# Altium PCB PCB2.PcbDoc
Units mm, origin at the board's own origin, x right, y up, seen from the top; angles counter-clockwise.
Board outline 56 x 65 mm, 4 copper layers (Top Layer, Mid Layer 1, Mid Layer 2, Bottom Layer), stack 0.97 mm thick; 35 components, 26 nets, 144 pads, 248 vias.
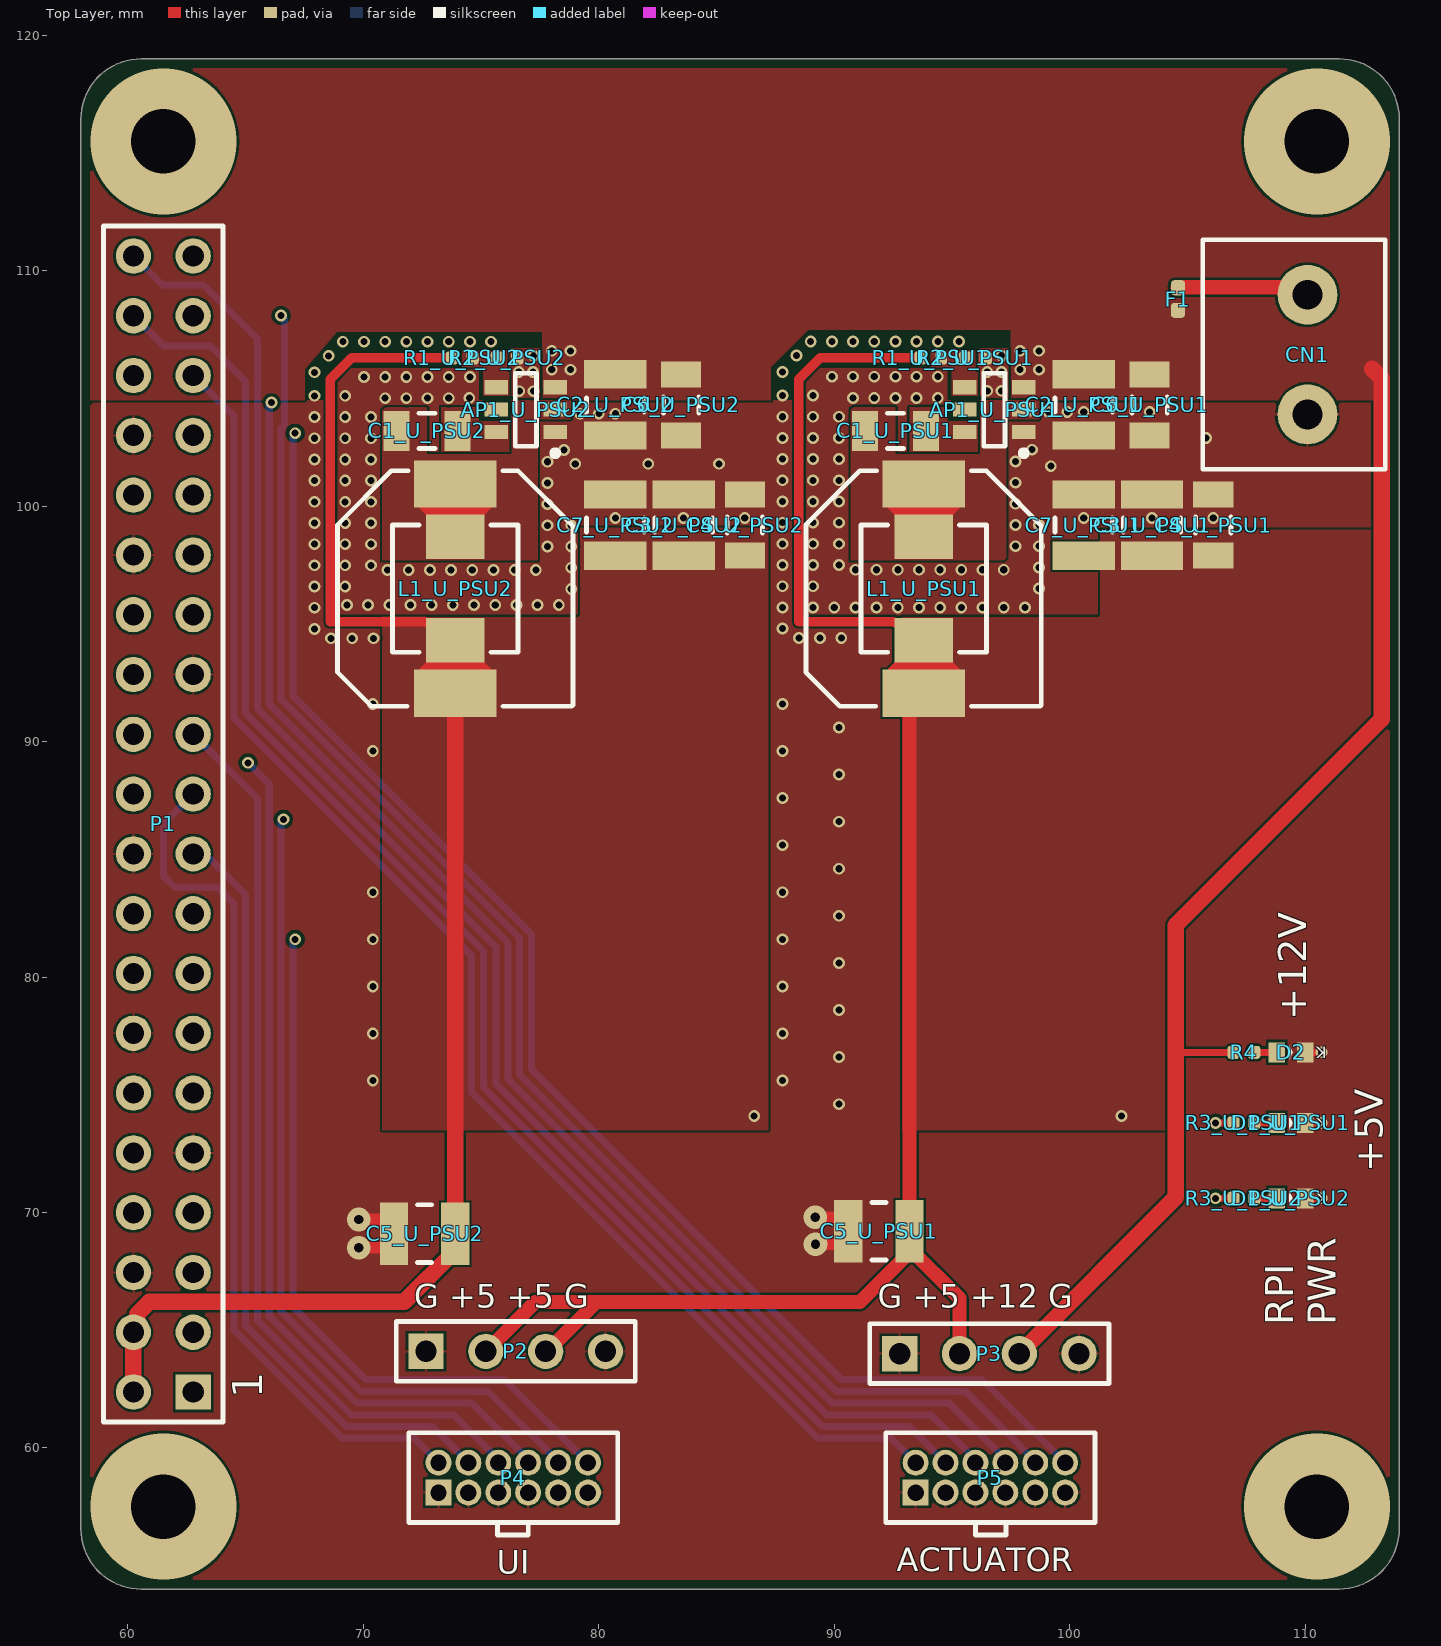
[diagram p0: Top Layer view]
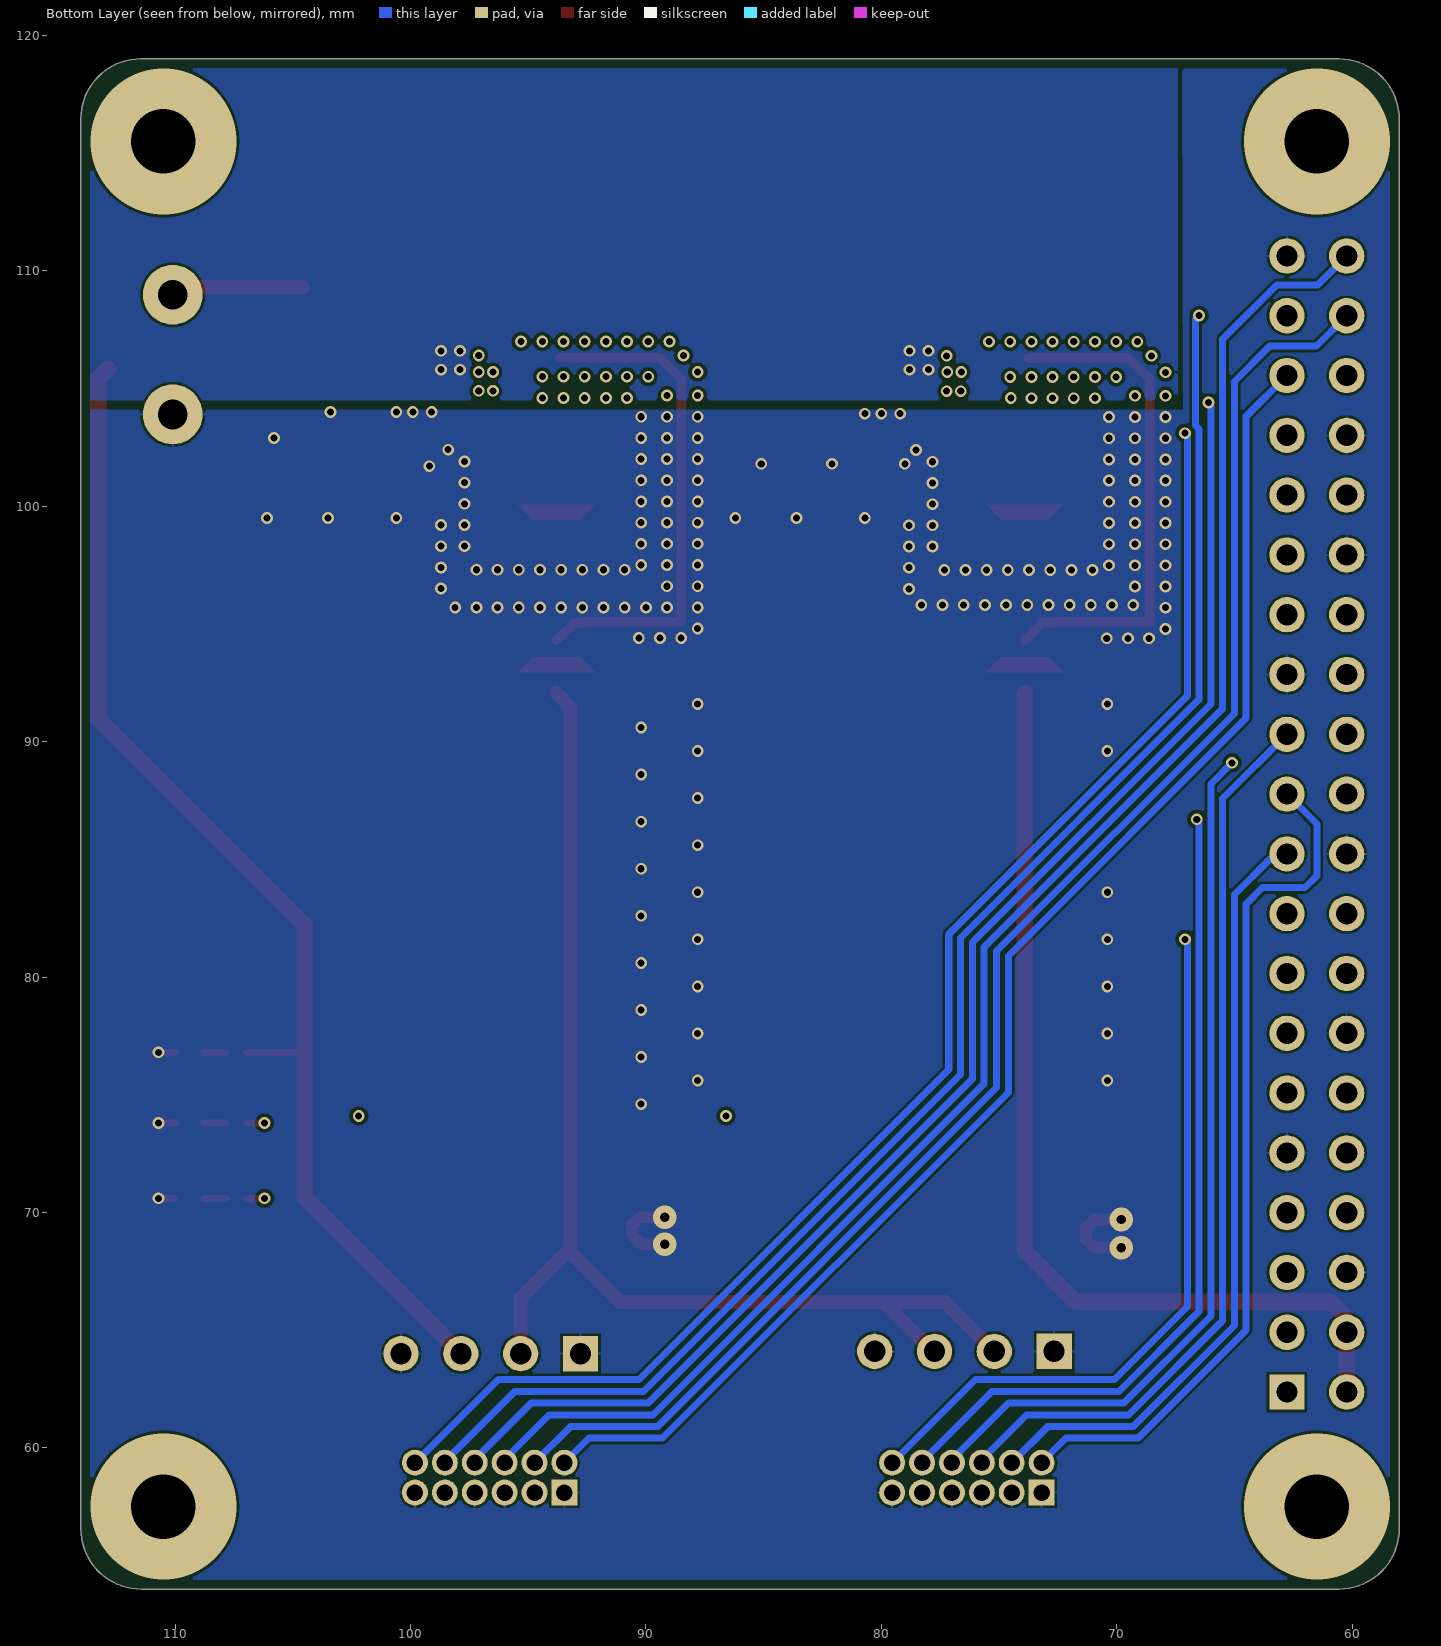
[diagram p1: Bottom Layer view, seen from below]
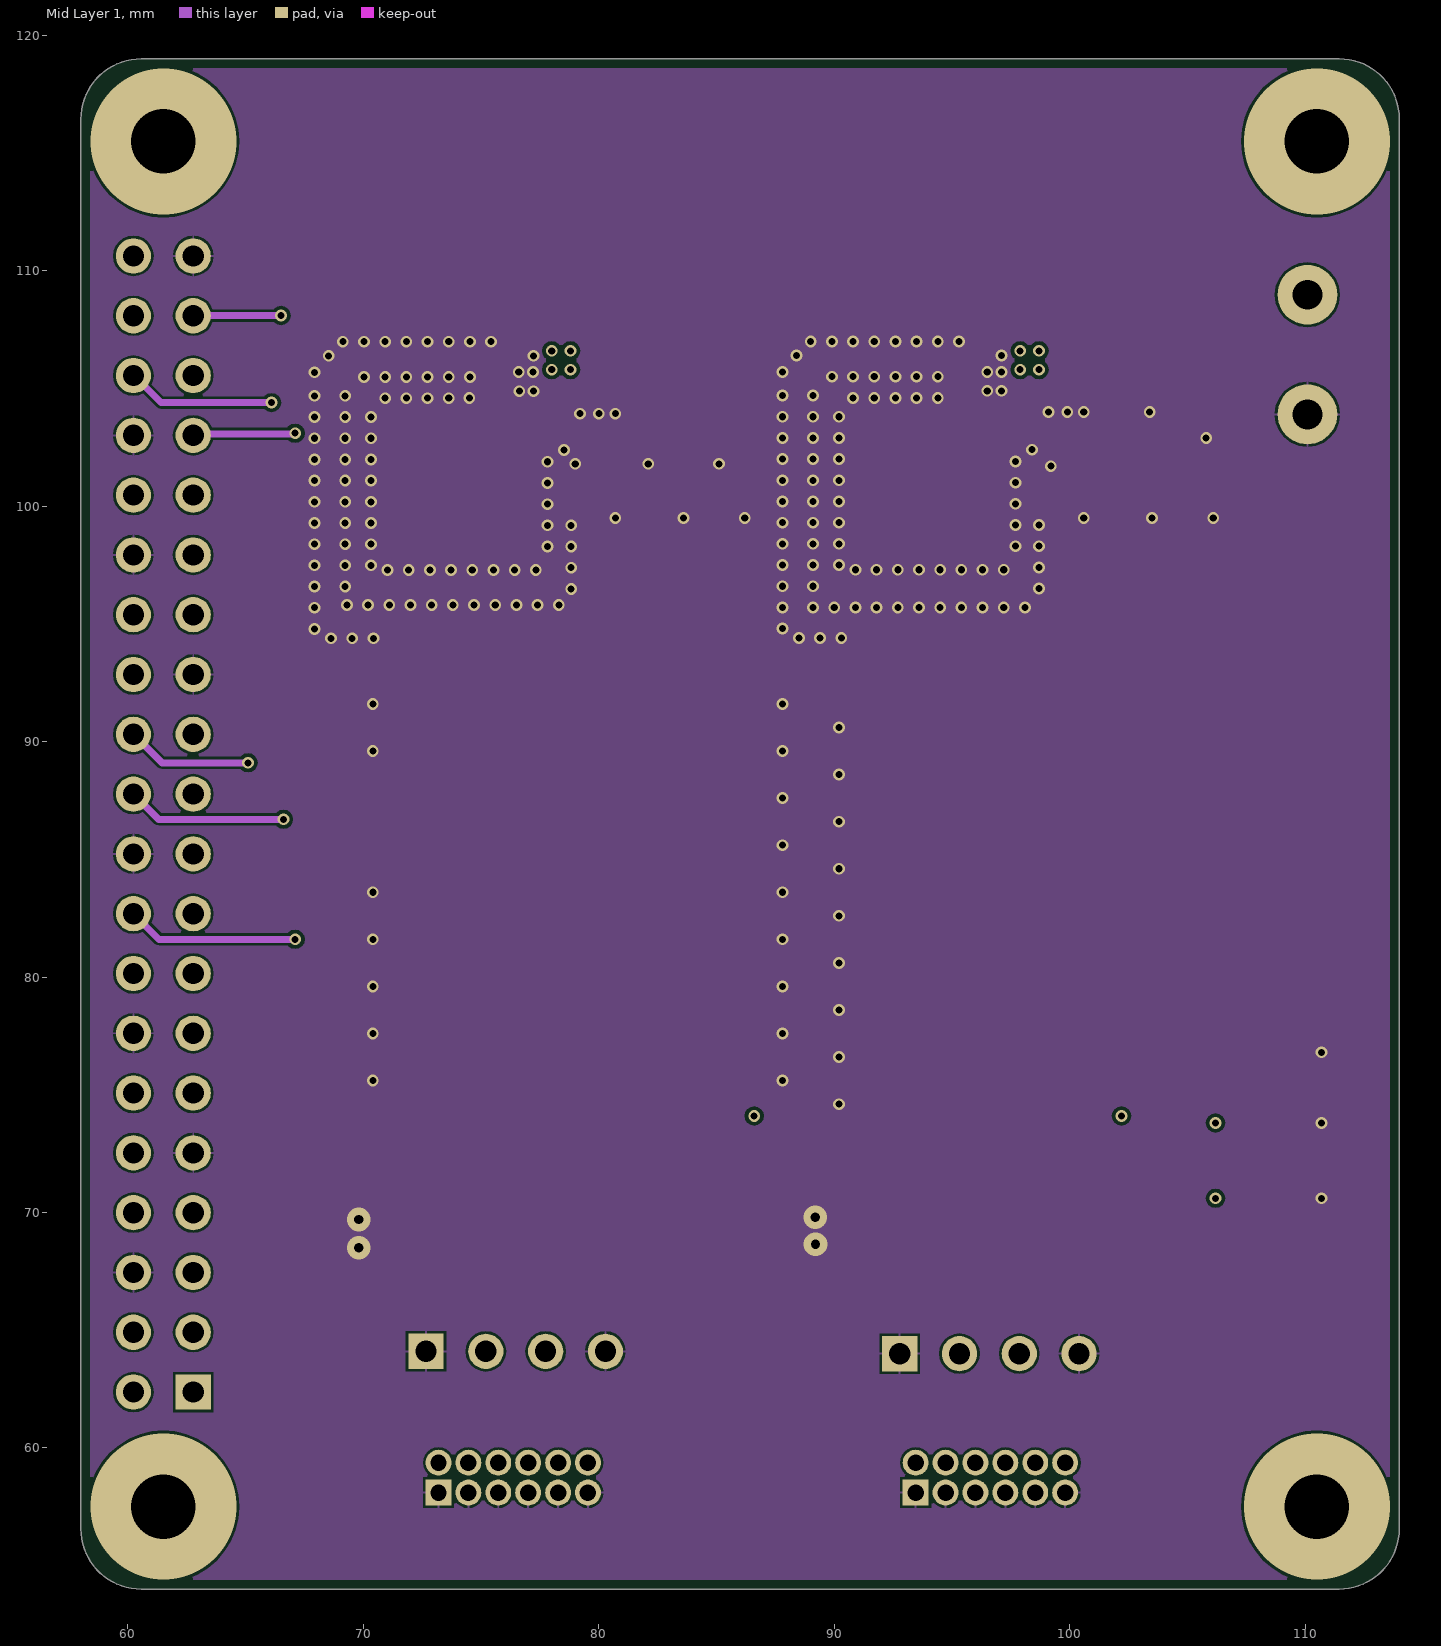
[diagram p2: Mid Layer 1]
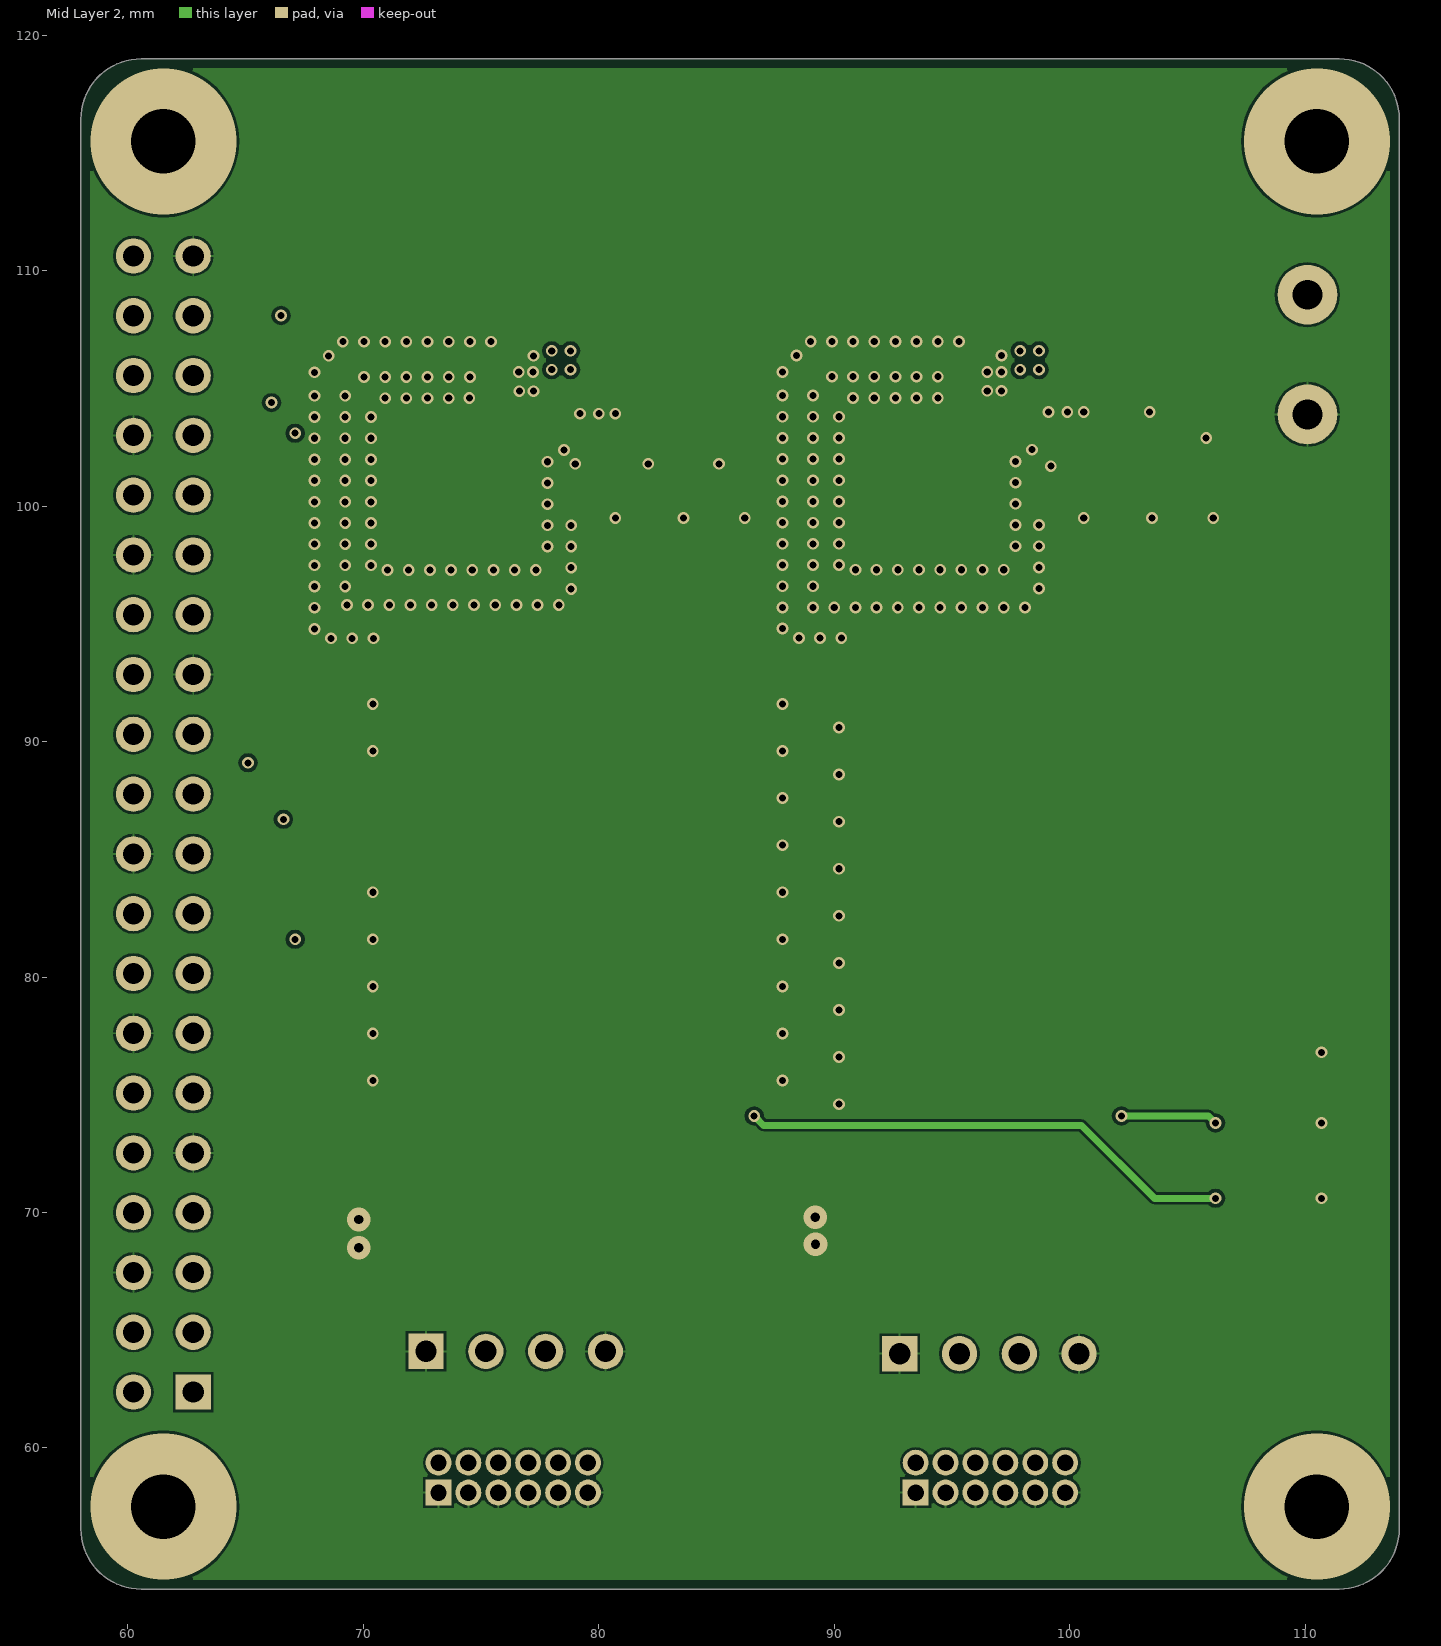
[diagram p3: Mid Layer 2]
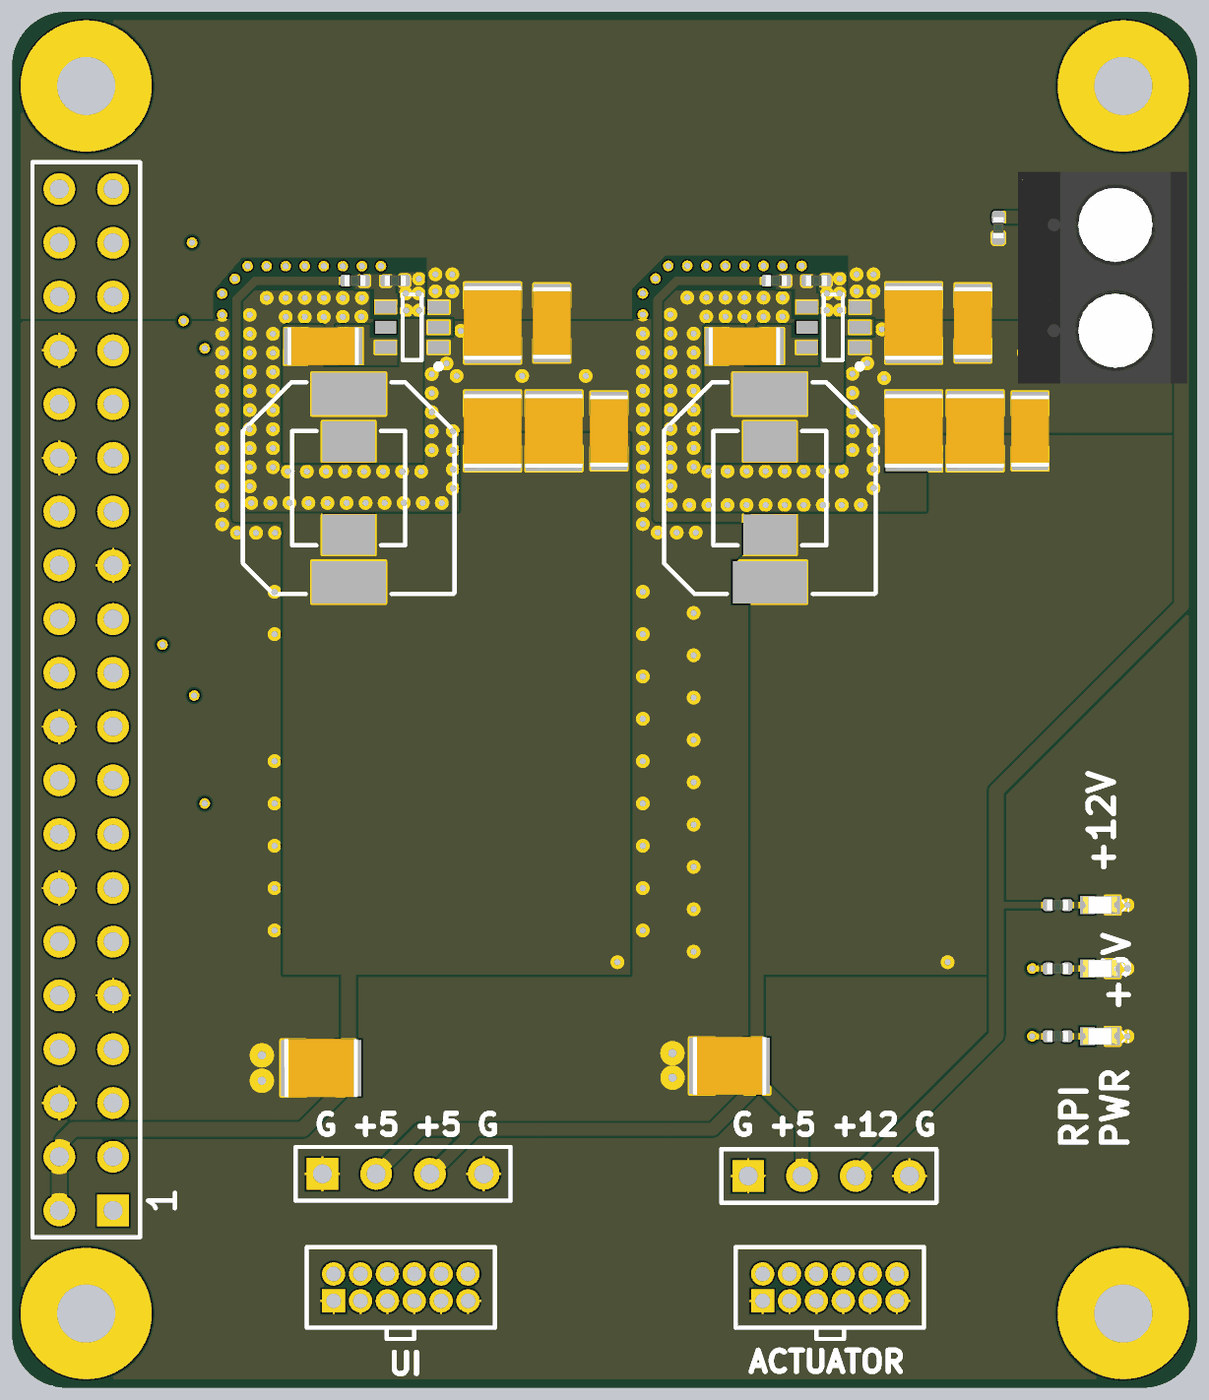
[diagram p4: 3D render of the assembled board from above, using the file's embedded part models]

## Layer stack, top to bottom
Top Solder: solder mask 0.0127, Solder Resist, Dk 3.8
Top Layer: signal copper 0.035
Dielectric 1: prepreg 0.2, 7628, Dk 4.6
Mid Layer 1: signal copper 0.0175
Core: core 0.465, FR-4, Dk 4.5
Mid Layer 2: signal copper 0.0175
Dielectric 2: prepreg 0.2, 7628, Dk 4.6
Bottom Layer: signal copper 0.035
Bottom Solder: solder mask 0.0127, Solder Resist, Dk 3.8

## Board outline
58,56.558 58,116.442 cw(c60.558,116.442) 60.558,119 111.461,119 cw(c111.461,116.461) 114,116.461 114,56.558 cw(c111.442,56.558) 111.442,54 60.558,54 cw(c60.558,56.558)

## Design rules (kind name [scope] priority, off if disabled: settings)
BoardOutlineClearance [All] p1: gap=0.2 ignorepadtopadclearanceinfootprint=FALSE
Clearance [All] p1: gap=0.102 ignorepadtopadclearanceinfootprint=FALSE except(0.127: Arc-Via Track-Via SMDPad-Via THPad-Via Via-Via Via-Fill Via-Poly Via-Region Via-Text; 0.25: Arc-Hole Track-Hole SMDPad-Hole THPad-Hole Via-Hole Fill-Hole Poly-Hole Region-Hole Text-Hole)
ComponentClearance [All] p1: gap=0.102 collisioncheckmode=3 verticalgap=0.102 showdistances=TRUE
DiffPairsRouting [All] p1: maxlimit=0.102 minlimit=0.102 mostfreqgap=0.102 toplayer_minwidth=0.102 toplayer_maxwidth=1816.048 toplayer_prefwidth=0.102 midlayer1_minwidth=0.102 midlayer1_maxwidth=1816.048 midlayer1_prefwidth=0.102 midlayer2_minwidth=0.102 midlayer2_maxwidth=1816.048 midlayer2_prefwidth=0.102 bottomlayer_minwidth=0.102 bottomlayer_maxwidth=1816.048 bottomlayer_prefwidth=0.102 maxuncoupledlength=12.7
Height [All] p1: minheight=0 maxheight=1816.048 prefheight=12.7
HoleSize [All] p1: absolutevalues=TRUE maxlimit=6.3 minlimit=0.3 maxpercent=80.000 minpercent=20.000
HoleToHoleClearance [All] p1: gap=0.25 allowstackedmicrovias=FALSE
MinimumAnnularRing [All] p1: minimumring=0.076
MinimumSolderMaskSliver [All] p1: minsoldermaskwidth=0
PlaneClearance [All] p1: clearance=0.102
PlaneConnect PlaneConnectPowerPads [InPadClass('PowerPads')] p1: planeconnectstyle=Direct reliefexpansion=0.508 reliefentries=4 reliefconductorwidth=0.254 reliefairgap=0.254
PlaneConnect [All] p2: pad.planeconnectstyle=Relief pad.reliefexpansion=0.3 pad.reliefentries=4 pad.reliefconductorwidth=0.102 pad.reliefairgap=0.102 via.planeconnectstyle=Direct via.reliefexpansion=0.3 via.reliefentries=4 via.reliefconductorwidth=0.127 via.reliefairgap=0.127
PolygonConnect PolygonConnectPowerPads [All vs (InPadClass('PowerPads'))] p1: connectstyle=Direct reliefconductorwidth=0.254 reliefentries=4 polygonreliefangle="90 Angle" airgapwidth=0.254
PolygonConnect [All] p2: thpad.connectstyle=Relief thpad.reliefconductorwidth=0.102 thpad.reliefentries=4 thpad.polygonreliefangle="90 Angle" thpad.airgapwidth=0.102 smdpad.connectstyle=Relief smdpad.reliefconductorwidth=0.102 smdpad.reliefentries=4 smdpad.polygonreliefangle="90 Angle" smdpad.airgapwidth=0.102 via.connectstyle=Direct via.reliefconductorwidth=0.127 via.reliefentries=4 via.polygonreliefangle="90 Angle" via.airgapwidth=0.127
RoomDefinition U_PSU2 [InComponentClass('U_PSU2')] p1: confinementstyle=ConfineIn formatcopy=TRUE lockcomponents=FALSE outline 64.2,64.9 87.3,64.9 87.3,111.1 64.2,111.1
RoomDefinition U_PSU1 [InComponentClass('U_PSU1')] p2: confinementstyle=ConfineIn formatcopy=TRUE lockcomponents=FALSE outline 87.3,64.9 107.2,64.9 107.2,111.1 87.3,111.1
RoutingVias [All] p1: holewidth=0.2 width=0.45 viastyle="Through Hole" minholewidth=0.2 minwidth=0.45 maxholewidth=6.3 maxwidth=6.55
SilkToSilkClearance [All] p1: silktosilkclearance=0
SilkToSolderMaskClearance [IsPad] p1: minsilkscreentomaskgap=0.102 clearancetoexposedcopper=TRUE
SolderMaskExpansion [All] p1: expansion=0.075 istentingtop=FALSE
Width [All] p1: maxlimit=1816.048 minlimit=0.102 preferedwidth=0.102
20 further rules are at their usual default settings.

## Classes and differential pairs
channel class PSU: U_PSU1 U_PSU2
component class U_PSU2: AP1_U_PSU2 C1_U_PSU2 C2_U_PSU2 C3_U_PSU2 C4_U_PSU2 C5_U_PSU2 C6_U_PSU2 C7_U_PSU2 D1_U_PSU2 L1_U_PSU2 R1_U_PSU2 R2_U_PSU2 R3_U_PSU2
component class U_PSU1: AP1_U_PSU1 C1_U_PSU1 C2_U_PSU1 C3_U_PSU1 C4_U_PSU1 C5_U_PSU1 C6_U_PSU1 C7_U_PSU1 D1_U_PSU1 L1_U_PSU1 R1_U_PSU1 R2_U_PSU1 R3_U_PSU1
component class main: CN1 D2 F1 P1 P2 P3 P4 P5 R4

## Components (designator, comment, footprint, x,y, rotation, side; value= is the part's Value field where it differs from the comment)
AP1_U_PSU1 "AP62301" SOT95P280X100-6L 96.8,104.1 r180 top (schematic designator AP1)
AP1_U_PSU2 "AP62301" SOT95P280X100-6L 76.9,104.1 r180 top (schematic designator AP1)
C1_U_PSU1 "100n" C3216_1206I_L 92.6,103.2 r180 top (schematic designator C1)
C1_U_PSU2 "100n" C3216_1206I_L 72.7,103.2 r180 top (schematic designator C1)
C2_U_PSU1 "10u" C3225_1210I_L 100.6,104.3 r270 top (schematic designator C2)
C2_U_PSU2 "10u" C3225_1210I_L 80.7,104.3 r270 top (schematic designator C2)
C3_U_PSU1 "22u" C3225_1210I_L 103.5,99.2 r90 top (schematic designator C3)
C3_U_PSU2 "22u" C3225_1210I_L 83.6,99.2 r90 top (schematic designator C3)
C4_U_PSU1 "100n" C3216_1206I_L 106.1,99.2 r90 top (schematic designator C4)
C4_U_PSU2 "100n" C3216_1206I_L 86.2,99.2 r90 top (schematic designator C4)
C5_U_PSU1 "22u" C3225_1210I_L 91.9,69.2 r180 top (schematic designator C5)
C5_U_PSU2 "22u" C3225_1210I_L 72.6,69.1 r180 top (schematic designator C5)
C6_U_PSU1 "100n" C3216_1206I_L 103.4,104.3 r270 top (schematic designator C6)
C6_U_PSU2 "100n" C3216_1206I_L 83.5,104.3 r270 top (schematic designator C6)
C7_U_PSU1 "22u" C3225_1210I_L 100.6,99.2 r90 top (schematic designator C7)
C7_U_PSU2 "22u" C3225_1210I_L 80.7,99.2 r90 top (schematic designator C7)
CN1 "VRSTNA SPONKA 2P/16A" "VRSTNA SPONKA 2P/16A" 110.1,108.98 r270 top
D1_U_PSU1 "LED" LED1608_0603I_L 109.4,73.8 r180 top (schematic designator D1)
D1_U_PSU2 "LED" LED1608_0603I_L 109.4,70.6 r180 top (schematic designator D1)
D2 "LED" LED1608_0603I_L 109.4,76.8 r180 top
F1 "FUSE" R1005_0402i_M 104.6,108.8 r90 top
L1_U_PSU1 "3.3uH" INDUCTOR 93.8,96.5 r270 top (schematic designator L1)
L1_U_PSU2 "3.3uH" INDUCTOR 73.9,96.5 r270 top (schematic designator L1)
P1 "RPI Header" HDR2X20 62.77,62.37 r90 top locked
P2 "UI PWR" HDR1X4 72.66,64.1 r0 top
P3 "ACT PWR" HDR1X4 92.78,64 r0 top locked
P4 "UI" "1.27MM HEADET THT" 78.27,59.37 r0 top locked
P5 "ACTUATOR" "1.27MM HEADET THT" 98.54,59.37 r0 top locked
R1_U_PSU1 "52.3k 1%" R1005_0402i_L 94.1,106.3 r0 top (schematic designator R1)
R1_U_PSU2 "52.3k 1%" R1005_0402i_L 74.2,106.3 r0 top (schematic designator R1)
R2_U_PSU1 "10k 1%" R1005_0402i_L 96,106.3 r0 top (schematic designator R2)
R2_U_PSU2 "10k 1%" R1005_0402i_L 76.1,106.3 r0 top (schematic designator R2)
R3_U_PSU1 "~300" R1005_0402i_L 107.4,73.8 r0 top (schematic designator R3)
R3_U_PSU2 "~300" R1005_0402i_L 107.4,70.6 r0 top (schematic designator R3)
R4 "~3k" R1005_0402i_L 107.4,76.8 r0 top

## Footprints (in the part's own frame and the unit in brackets; to place one, negate y for a bottom-side part, rotate by r counter-clockwise, add the part's x,y. Pads: shape width x height; smd on the part's side, far side on the other; paste and mask are expansions set on the pad)
"1.27MM HEADET THT" [mm]
  rect 1.1x1.1 hole 0.7: 1(-5.08,-1.27)
  round 1.1 hole 0.7: 2(-5.08,0) 3(-3.81,-1.27) 4(-3.81,0) 5(-2.54,-1.27) 6(-2.54,0) 7(-1.27,-1.27) 8(-1.27,0) 9(0,-1.27) 10(0,0) 11(1.27,-1.27) 12(1.27,0)
  silkscreen extent -6.35,-2.54 2.54,1.27
C3216_1206I_L [mm] "Chip Capacitor, 2-Leads, Body 3.20x1.60mm, IPC High Density"
  rect 1.1x1.7 smd: 1(-1.3,0) 2(1.3,0)
  silkscreen extent -0.35,-0.75 0.35,0.75, body extent -1.7,-0.9 1.7,0.9, height 1.8
C3225_1210I_L [mm] "Chip Capacitor, 2-Leads, Body 3.20x2.50mm, IPC High Density"
  rect 1.2x2.65 smd: 1(-1.3,0) 2(1.3,0)
  silkscreen extent -0.3,-1.22 0.3,1.23, body extent -1.75,-1.38 1.75,1.38, height 2.8
HDR1X4 [mm] "Connector; Header; 4 Position"
  rect 1.5x1.5 hole 0.9: 1(0,0)
  round 1.5 hole 0.9: 2(2.54,0) 3(5.08,0) 4(7.62,0)
  silkscreen extent -1.27,-1.27 8.89,1.27
HDR2X20 [mm] "Connector; Header; 20x2 Position"
  rect 1.5x1.5 hole 0.9: 1(0,0)
  round 1.5 hole 0.9: 2(0,2.54) 3(2.54,0) 4(2.54,2.54) 5(5.08,0) 6(5.08,2.54) 7(7.62,0) 8(7.62,2.54) 9(10.16,0) 10(10.16,2.54) 11(12.7,0) 12(12.7,2.54) 13(15.24,0) 14(15.24,2.54) 15(17.78,0) 16(17.78,2.54) 17(20.32,0) 18(20.32,2.54) 19(22.86,0) 20(22.86,2.54) 21(25.4,0) 22(25.4,2.54) 23(27.94,0) 24(27.94,2.54) 25(30.48,0) 26(30.48,2.54) 27(33.02,0) 28(33.02,2.54) 29(35.56,0) 30(35.56,2.54) 31(38.1,0) 32(38.1,2.54) 33(40.64,0) 34(40.64,2.54) 35(43.18,0) 36(43.18,2.54) 37(45.72,0) 38(45.72,2.54) 39(48.26,0) 40(48.26,2.54)
  silkscreen extent -1.27,-1.27 49.53,3.81
INDUCTOR [mm]
  rect 2x3.5 smd: 1(-4.445,0) 2(4.445,0)
  rect 1.9x2.5 smd: 1(-2.2,0) 2(2.2,0)
  Top Layer region: -3.556,1.651 -2.921,1.016 -2.921,-1.016 -3.556,-1.651
  Top Layer region: -1.143,1.778
  Top Layer region: 3.556,-1.651 2.921,-1.016 2.921,1.016 3.556,1.651
  silkscreen extent -5,-5 5,5
LED1608_0603I_L [mm] "SMD LED, 2-Leads, Body 1.57x0.85mm, IPC High Density"
  rect 0.7x0.85 smd: 1(-0.6,0) 2(0.6,0)
  silkscreen extent -0.08,-0.3 0.08,0.3, body extent -0.8,-0.4 0.8,0.4, height 0.7
R1005_0402i_L [mm] "Resistor, Chip; 1.00 mm L X 0.50 mm W X 0.40 mm H body"
  rrect50% 0.52x0.56 smd: 1(-0.44,0) 2(0.44,0)
  body extent -0.5,-0.25 0.5,0.25, height 0.4
R1005_0402i_M [mm] "Resistor, Chip; 1.00 mm L X 0.50 mm W X 0.40 mm H body"
  rrect50% 0.64x0.6 smd: 1(-0.48,0) 2(0.48,0)
  body extent -0.5,-0.25 0.5,0.25, height 0.4
SOT95P280X100-6L [mm] "SOT23, 6-Leads, Body 2.90x2.80mm, Pitch 0.95mm, IPC High Density"
  rect 1x0.6 smd: 1(-1.25,0.95) 2(-1.25,0) 3(-1.25,-0.95) 4(1.25,-0.95) 5(1.25,0) 6(1.25,0.95)
  silkscreen extent -1.38,-1.55 0.45,1.97, body extent -1.5,-1.55 1.5,1.55, height 1
"VRSTNA SPONKA 2P/16A" [mm]
  round 2.54 hole 1.27: 1(0,0) 2(5.08,0)
  silkscreen extent -2.34,-4.45 7.42,3.3, body extent -2.46,-4.57 7.54,3.43, height 10.01

## Part data
C1_U_PSU1 C1_U_PSU2 C2_U_PSU1 C2_U_PSU2 C3_U_PSU1 C3_U_PSU2 C4_U_PSU1 C4_U_PSU2 C5_U_PSU1 C5_U_PSU2 C6_U_PSU1 C6_U_PSU2 C7_U_PSU1 C7_U_PSU2: library part C, "Capacitor"
L1_U_PSU1 L1_U_PSU2: library part L, "L"
P1: library part "Header 20X2", "Header, 20-Pin, Dual row", LatestRevisionDate=17-Jul-2002, LatestRevisionNote="Re-released for DXP Platform.", Publisher="Altium Limited"
P2 P3: library part "Header 4", "Header, 4-Pin", LatestRevisionDate=17-Jul-2002, LatestRevisionNote="Re-released for DXP Platform.", Publisher="Altium Limited"
P4 P5: library part "Header 6X2", "Header, 6-Pin, Dual row", LatestRevisionDate=17-Jul-2002, LatestRevisionNote="Re-released for DXP Platform.", Publisher="Altium Limited"
R1_U_PSU1 R1_U_PSU2 R2_U_PSU1 R2_U_PSU2 R3_U_PSU1 R3_U_PSU2 R4: library part R, "R"

## Via types
v1: diameter 0.5, hole 0.3, Top Layer to Bottom Layer, 240 vias
v2: diameter 1, hole 0.4, Top Layer to Bottom Layer, 4 vias
v3: diameter 6.2, hole 2.75, Top Layer to Bottom Layer, 4 vias

## Nets (pads, with @x,y where several pads share a name; then routed paths per layer and width w, separated by ;. In a path a pad name is that pad's centre, name@x,y a point inside that pad or via, vN(x,y) a via of type N, cw(c..) or ccw(c..) an arc to the next point about the centre after c; other vN are vias at no path point)
+12: AP1_U_PSU1.3 AP1_U_PSU2.3 C2_U_PSU1.1 C2_U_PSU2.1 C6_U_PSU1.1 C6_U_PSU2.1 F1.1 P3.3 R4.1 | length 50.9
  Top Layer w0.3: 104.5,76.9 104.6,76.8 R4.1
  Top Layer w0.7: P3.3 104.5,70.64 104.5,76.9 104.5,82.2 113.255,90.955 113.255,105.43 112.845,105.84
  other v1: 78,105.8 78.8,105.8 97.9,105.8 98.7,105.8 78,106.6 78.8,106.6 97.9,106.6 98.7,106.6
ACT_INT: P1.33 P5.12 | length 65.2
  Mid Layer 1 w0.3: P1.33 62.831,103.071 67.071,103.071 v1(67.1,103.1)
  Bottom Layer w0.3: v1(67.1,103.1) 67.1,103.059 67,102.959 67,91.949 77.135,81.814 77.135,76.065 90.3,62.9 96.27,62.9 P5.12@99.8,59.37
ACT_MISO: P1.35 P5.2 | length 60.7
  Bottom Layer w0.3: P1.35 64.5,103.82 64.5,91 74.6,80.9 74.6,75.1 89.288,60.412 92.418,60.412 P5.2
ACT_MOSI: P1.38 P5.4 | length 66.3
  Bottom Layer w0.3: P1.38 61.52,106.8 63.5,106.8 65,105.3 65,91.2 75.1,81.1 75.1,75.3 89.502,60.898 93.202,60.898 P5.4
ACT_R\E\S\E\T\: P1.37 P5.10 | length 68.6
  Mid Layer 1 w0.3: P1.37 62.775,108.095 66.495,108.095 v1(66.5,108.1)
  Bottom Layer w0.3: v1(66.5,108.1) 66.65,107.95 66.65,103.428 66.5,103.278 66.5,91.8 76.636,81.664 76.636,75.864 90.1,62.4 95.57,62.4 P5.10@98.228,59.742
ACT_S\S\: P1.36 P5.8 | length 67.2
  Mid Layer 1 w0.3: P1.36 60.25,105.55 61.4,104.4 v1(66.1,104.4)
  Bottom Layer w0.3: v1(66.1,104.4) 66.1,104.346 66,104.246 66,91.6 76.135,81.465 76.135,75.665 89.9,61.9 94.87,61.9 P5.8@97.27,59.5
ACT_SCK: P1.40 P5.6 | length 69.5
  Bottom Layer w0.3: P1.40 61.46,109.4 63.2,109.4 65.498,107.102 65.498,91.402 75.634,81.266 75.634,75.466 89.7,61.4 94.11,61.4 P5.6@96,59.51
GND: AP1_U_PSU1.1 AP1_U_PSU2.1 C2_U_PSU1.2 C2_U_PSU2.2 C3_U_PSU1.2 C3_U_PSU2.2 C4_U_PSU1.2 C4_U_PSU2.2 C5_U_PSU1.2 C5_U_PSU2.2 C6_U_PSU1.2 C6_U_PSU2.2 C7_U_PSU1.2 C7_U_PSU2.2 CN1.2 D1_U_PSU1.1 D1_U_PSU2.1 D2.1 P1.6 P1.9 P1.14 P1.20 P1.25 P1.30 P1.34 P1.39 P2.1 P2.4 P3.1 P3.4 P4.1 P4.3 P4.5 P4.7 P4.9 P4.11 P5.1 P5.3 P5.5 P5.7 P5.9 P5.11 R2_U_PSU1.2 R2_U_PSU2.2 | length 9.4
  Top Layer w0.3: D1_U_PSU2.1 v1(110.7,70.6) ; D1_U_PSU1.1 v1(110.7,73.8) ; D2.1 v1(110.7,76.8)
  Top Layer w0.5: v2(69.8,68.5) 70.95,68.5 71.3,68.85 C5_U_PSU2.2 71.3,69.35 70.95,69.7 v2(69.8,69.7) ; v2(89.2,69.8) 90.25,69.8 90.6,69.45 C5_U_PSU1.2 90.6,69.05 90.194,68.644 v2(89.204,68.644)
  other v1: 90.2,74.6 70.4,75.6 87.8,75.6 90.2,76.6 70.4,77.6 87.8,77.6 90.2,78.6 70.4,79.6 87.8,79.6 90.2,80.6 70.4,81.6 87.8,81.6 90.2,82.6 70.4,83.6 87.8,83.6 90.2,84.6 87.8,85.6 90.2,86.6 87.8,87.6 90.2,88.6 70.4,89.6 87.8,89.6 90.2,90.6 70.4,91.6 87.8,91.6 68.625,94.387 69.525,94.387 70.425,94.387 88.5,94.4 89.4,94.4 90.3,94.4 67.925,94.787 87.8,94.8 67.925,95.687 87.8,95.7 89.1,95.7 90,95.7 90.9,95.7 91.8,95.7 92.7,95.7 93.6,95.7 94.5,95.7 95.4,95.7 96.3,95.7 97.2,95.7 98.1,95.7 69.3,95.8 70.2,95.8 71.1,95.8 72,95.8 72.9,95.8 73.8,95.8 74.7,95.8 75.6,95.8 76.5,95.8 77.4,95.8 78.3,95.8 78.825,96.487 98.7,96.5 67.925,96.587 69.225,96.587 87.8,96.6 89.1,96.6 71.025,97.287 71.925,97.287 72.825,97.287 73.725,97.287 74.625,97.287 75.525,97.287 76.425,97.287 77.325,97.287 90.9,97.3 91.8,97.3 92.7,97.3 93.6,97.3 94.5,97.3 95.4,97.3 96.3,97.3 97.2,97.3 78.825,97.387 98.7,97.4 67.925,97.487 69.225,97.487 70.325,97.487 87.8,97.5 89.1,97.5 90.2,97.5 77.825,98.287 78.825,98.287 97.7,98.3 98.7,98.3 67.925,98.387 69.225,98.387 70.325,98.387 87.8,98.4 89.1,98.4 90.2,98.4 77.825,99.187 78.825,99.187 97.7,99.2 98.7,99.2 67.925,99.287 69.225,99.287 70.325,99.287 87.8,99.3 89.1,99.3 90.2,99.3 80.7,99.5 83.6,99.5 86.2,99.5 100.6,99.5 103.5,99.5 106.1,99.5 77.825,100.087 97.7,100.1 67.925,100.187 69.225,100.187 70.325,100.187 87.8,100.2 89.1,100.2 90.2,100.2 77.825,100.987 97.7,101 67.925,101.087 69.225,101.087 70.325,101.087 87.8,101.1 89.1,101.1 90.2,101.1 99.2,101.7 79,101.8 82.1,101.8 85.1,101.8 77.825,101.887 97.7,101.9 67.925,101.987 69.225,101.987 70.325,101.987 87.8,102 89.1,102 90.2,102 78.525,102.387 98.4,102.4 67.925,102.887 69.225,102.887 70.325,102.887 87.8,102.9 89.1,102.9 90.2,102.9 105.8,102.9 67.925,103.787 69.225,103.787 70.325,103.787 87.8,103.8 89.1,103.8 90.2,103.8 79.2,103.928 80,103.928 80.7,103.928 99.1,104 99.9,104 100.6,104 103.4,104 70.925,104.587 71.825,104.587 72.725,104.587 73.625,104.587 74.5,104.6 90.8,104.6 91.7,104.6 92.6,104.6 93.5,104.6 94.4,104.6 67.925,104.687 69.225,104.687 87.8,104.7 89.1,104.7 76.625,104.887 77.225,104.887 96.5,104.9 97.1,104.9 70.025,105.487 70.925,105.487 71.825,105.487 72.725,105.487 73.625,105.487 74.525,105.487 89.9,105.5 90.8,105.5 91.7,105.5 92.6,105.5 93.5,105.5 94.4,105.5 67.925,105.687 76.6,105.7 77.2,105.7 87.8,105.7 96.5,105.7 97.1,105.7 68.525,106.387 77.225,106.387 88.4,106.4 97.1,106.4 69.125,106.987 70.025,106.987 70.925,106.987 71.825,106.987 72.725,106.987 73.625,106.987 74.525,106.987 75.425,106.987 89,107 89.9,107 90.8,107 91.7,107 92.6,107 93.5,107 94.4,107 95.3,107
NetAP1_U_PSU1_2: AP1_U_PSU1.2 C1_U_PSU1.2 L1_U_PSU1.1
NetAP1_U_PSU1_4: AP1_U_PSU1.4 R1_U_PSU1.2 R2_U_PSU1.1
NetAP1_U_PSU1_6: AP1_U_PSU1.6 C1_U_PSU1.1
NetAP1_U_PSU2_2: AP1_U_PSU2.2 C1_U_PSU2.2 L1_U_PSU2.1
NetAP1_U_PSU2_4: AP1_U_PSU2.4 R1_U_PSU2.2 R2_U_PSU2.1
NetAP1_U_PSU2_6: AP1_U_PSU2.6 C1_U_PSU2.1
NetCN1_1: CN1.1 F1.2 | length 5.7
  Top Layer w0.6: F1.2@104.58,109.3 F1.2 104.6,109.3 109.78,109.3 CN1.1
NetD1_U_PSU1_2: D1_U_PSU1.2 R3_U_PSU1.2 | length 1
  Top Layer w0.3: R3_U_PSU1.2 D1_U_PSU1.2
NetD1_U_PSU2_2: D1_U_PSU2.2 R3_U_PSU2.2 | length 1
  Top Layer w0.3: R3_U_PSU2.2 D1_U_PSU2.2
NetD2_2: D2.2 R4.2 | length 1
  Top Layer w0.3: R4.2 D2.2
"OUT +5": C3_U_PSU1.1 C4_U_PSU1.1 C5_U_PSU1.1 C7_U_PSU1.1 L1_U_PSU1.2 P2.2 P2.3 P3.2 R1_U_PSU1.1 R3_U_PSU1.1 | length 78.5
  Top Layer w0.3: v1(106.2,73.8) R3_U_PSU1.1
  Top Layer w0.4: R1_U_PSU1.1 89.4,106.3 88.5,105.4 88.5,95.1 92.516,95.1 92.566,95.05 93.05,95.05 L1_U_PSU1.2@93.8,94.3
  Top Layer w0.6: P2.2 77.3,66.2 79.9,66.2 ; P2.3 77.8,64.1 79.9,66.2 ; L1_U_PSU1.2@93.8,92.055 93.2,91.455 C5_U_PSU1.1 C5_U_PSU1.1@93.2,68.475 ; P3.2 95.32,66.355 C5_U_PSU1.1@93.2,68.475 ; 79.9,66.2 91.1,66.2 93.2,68.3 C5_U_PSU1.1@93.2,68.475
  Mid Layer 2 w0.3: v1(102.2,74.1) 105.9,74.1 v1(106.2,73.8)
"RPI +5": C3_U_PSU2.1 C4_U_PSU2.1 C5_U_PSU2.1 C7_U_PSU2.1 L1_U_PSU2.2 P1.2 P1.4 R1_U_PSU2.1 R3_U_PSU2.1 | length 85
  Top Layer w0.3: v1(106.2,70.6) R3_U_PSU2.1
  Top Layer w0.4: R1_U_PSU2.1 69.5,106.3 68.6,105.4 68.6,95.1 72.616,95.1 72.666,95.05 73.15,95.05 L1_U_PSU2.2@73.9,94.3
  Top Layer w0.7: P1.2 P1.4 60.383,65.063 60.383,65.677 60.906,66.2 71.725,66.2 73.9,68.375 C5_U_PSU2.1 L1_U_PSU2.2@73.9,92.055
  Mid Layer 2 w0.3: v1(86.6,74.1) 87,73.7 100.5,73.7 103.6,70.6 v1(106.2,70.6)
UI_INT: P1.18 P4.12 | length 38.2
  Mid Layer 1 w0.3: P1.18 61.32,81.6 v1(67.1,81.6)
  Bottom Layer w0.3: v1(67.1,81.6) 67.1,81.559 67,81.459 67,66 70.1,62.9 76,62.9 79.53,59.37 P4.12
UI_MISO: P1.21 P4.2 | length 36.6
  Bottom Layer w0.3: P1.21 61.5,86.5 61.5,84.3 62,83.8 63.8,83.8 64.5,83.1 64.5,65 69.088,60.412 72.148,60.412 P4.2
UI_MOSI: P1.19 P4.4 | length 33.1
  Bottom Layer w0.3: P1.19 63,85 63.5,85 65,83.5 65,65.2 69.302,60.898 72.932,60.898 P4.4
UI_R\E\S\E\T\: P1.22 P4.10 | length 41.7
  Mid Layer 1 w0.3: P1.22 61.3,86.7 v1(66.6,86.7)
  Bottom Layer w0.3: v1(66.6,86.7) 66.6,86.659 66.5,86.559 66.5,65.8 69.9,62.4 75.3,62.4 P4.10@77.958,59.742
UI_S\S\: P1.24 P4.8 | length 42.9
  Mid Layer 1 w0.3: P1.24 61.44,89.1 v1(65.1,89.1)
  Bottom Layer w0.3: v1(65.1,89.1) 66,88.2 66,65.6 69.7,61.9 74.6,61.9 77,59.5 P4.8
UI_SCK: P1.23 P4.6 | length 38.9
  Bottom Layer w0.3: P1.23 65.5,87.58 65.5,65.4 69.5,61.4 73.84,61.4 75.73,59.51 P4.6
pads on no net: AP1_U_PSU1.5 AP1_U_PSU2.5 P1.1 P1.3 P1.5 P1.7 P1.8 P1.10 P1.11 P1.12 P1.13 P1.15 P1.16 P1.17 P1.26 P1.27 P1.28 P1.29 P1.31 P1.32
copper on no net:
  other v3: 61.5,57.5 110.5,57.5 61.5,115.5 110.5,115.5

## Polygon pours and split planes (outlines as drawn)
GND on Top Layer "NONET_L-01_P-001" (solid, remove dead copper, pour order 52): 58.4,104.5 58.4,54.4 113.6,54.4 113.6,104.5
+12 on Top Layer "NONET_L-01_P-001" (solid, remove dead copper, pour order 44): 87.302,105.9 87.302,104.5 78.8,104.5 77.6,104.5 77.6,107.4 68.88,107.4 67.5,105.808 67.5,104.5 58.4,104.5 58.4,118.6 89.6,118.6 89.651,108.249
"OUT +5" on Top Layer "NONET_L-01_P-001" (solid, remove dead copper, pour order 34): 92.9,95.4 92.9,73.5 104.2,73.5 104.2,82.5 112.8,91.1 112.8,99 101.2,99 101.2,95.4
+12 on Top Layer "NONET_L-01_P-001" (solid, remove dead copper, pour order 36): 113.6,104.5 100.9,104.5 97.5,104.5 97.5,107.5 88.505,107.5 88.078,107.052 87.9,107.3 87.9,118.6 113.6,118.6
GND on Top Layer "NONET_L-01_P-001" (solid, remove dead copper, pour order 48): 87.2,99.2 87.2,73.5 92.9,73.5 92.9,94.8 90.392,94.8 90.392,99.2
GND on Top Layer "NONET_L-01_P-001" (solid, remove dead copper, pour order 47): 87.2,99
GND on Top Layer "NONET_L-01_P-001" (solid, remove dead copper, pour order 40): 74.9,104.3 74.9,105.85 68.8,105.85 68.8,95.4 79.1,95.4 79.1,99.2 91.2,99.2 91.2,104.2 78.8,104.2 78.8,103.7 77.4,103.7 77.4,97.7 70.8,97.7 70.8,104.3
GND on Top Layer "NONET_L-01_P-001" (solid, remove dead copper, pour order 43): 76.1,106.7 77.5,106.7 77.5,104.5 76.2,104.5 76.2,105.7 76.1,105.7
"RPI +5" on Top Layer "NONET_L-01_P-001" (solid, remove dead copper, pour order 42): 70.8,95.5 70.8,73.5 87.2,73.5 87.2,99.1 79.1,99.1 79.1,95.5
no net on Top Layer "NONET_L-01_P-001" (solid, remove dead copper, pour order 41): 79.2,99.2
NetAP1_U_PSU2_4 on Top Layer "NONET_L-01_P-001" (solid, remove dead copper, pour order 39): 75.1,104.7 75.1,105.9 74.2,105.9 74.2,106.6 76.1,106.6 76.1,105.7 76.2,105.7 76.2,104.7
NetAP1_U_PSU2_6 on Top Layer "NONET_L-01_P-001" (solid, remove dead copper, pour order 38): 73.3,104.2 73.3,102.306 76.3,102.306 76.3,103.6 74.9,103.6 74.9,104.2
NetAP1_U_PSU2_2 on Top Layer "NONET_L-01_P-001" (solid, remove dead copper, pour order 37): 78.8,104.5 76.3,104.5 76.3,102.2 72.7,102.2 72.7,104.2 70.8,104.2 70.8,97.7 77.4,97.7 77.4,103.7 78.8,103.7
GND on Top Layer "NONET_L-01_P-001" (solid, remove dead copper, pour order 32): 94.8,104.3 94.8,105.85 88.8,105.85 88.8,95.4 101.2,95.4 101.2,99.2 113.5,99.2 113.5,104.3 98.7,104.3 98.7,103.7 97.3,103.7 97.3,97.7 90.7,97.7 90.7,104.3
GND on Top Layer "NONET_L-01_P-001" (solid, remove dead copper, pour order 35): 96,106.7 97.4,106.7 97.4,104.5 96.1,104.5 96.1,105.7 96,105.7
GND on Top Layer "NONET_L-01_P-001" (solid, remove dead copper, pour order 33): 101.2,99.2
NetAP1_U_PSU1_4 on Top Layer "NONET_L-01_P-001" (solid, remove dead copper, pour order 31): 95,104.7 95,105.9 94.1,105.9 94.1,106.6 96,106.6 96,105.7 96.1,105.7 96.1,104.7
NetAP1_U_PSU1_6 on Top Layer "NONET_L-01_P-001" (solid, remove dead copper, pour order 30): 93.2,104.2 93.2,102.306 96.2,102.306 96.2,103.6 94.8,103.6 94.8,104.2
NetAP1_U_PSU1_2 on Top Layer "NONET_L-01_P-001" (solid, remove dead copper, pour order 29): 98.7,104.5 96.2,104.5 96.2,102.2 92.6,102.2 92.6,104.2 90.7,104.2 90.7,97.7 97.3,97.7 97.3,103.7 98.7,103.7
GND on Mid Layer 2 "NONET_L-01_P-001" (solid, remove dead copper, pour order 50): 58.4,118.6 58.4,54.4 113.6,54.4 113.6,118.6
no net on Mid Layer 2 "NONET_L-01_P-001" (solid, remove dead copper, pour order 49): 58,119
GND on Bottom Layer "NONET_L-01_P-001" (solid, remove dead copper, pour order 45): 58.4,54.4 58.4,104.098 58.4,118.59 67.223,118.59 67.177,104.098 113.6,104.098 113.6,54.4
+12 on Bottom Layer "NONET_L-01_P-001" (solid, remove dead copper, pour order 46): 67.4,118.6 67.4,104.502 113.6,104.502 113.6,118.6
GND on Mid Layer 1 "NONET_L-01_P-001" (solid, remove dead copper, pour order 51): 58.4,118.6 113.6,118.6 113.6,54.4 58.4,54.4

## Silkscreen, mask and mechanical layers (free items; w line width, h text height)
Top Overlay:
  lines w0.2: 75.7,56.8 75.7,56.3 77,56.3 77,56.7 ; 96,56.8 96,56.3 97.3,56.3 97.3,56.8
  text "+12V" at 110.046,78.154 h1.2 r90
  text "+5V" at 113.3,71.7 h1.2 r90
  text "G +5 +5 G" at 72.154,65.954 h1
  text "G +5 +12 G" at 91.854,65.954 h1
  text "RPI / PWR" at 111.3,65.2 h1.2 r90
  text "ACTUATOR" at 92.654,54.754 h1
  text "UI" at 75.654,54.654 h1
Mechanical 1:
  the board outline again, w0.2

## Text inside footprints (layer, text, board x,y; h text height)
D1_U_PSU1: Top Overlay "K" at 110.924,74.029 h0.5 r180
D1_U_PSU2: Top Overlay "K" at 110.924,70.829 h0.5 r180
D2: Top Overlay "K" at 110.924,77.029 h0.5 r180
P1: Top Overlay "1" at 65.7,62.1 h1.27 r90